# EAGLE board RJ45_DIL (EAGLE 8.3.2)
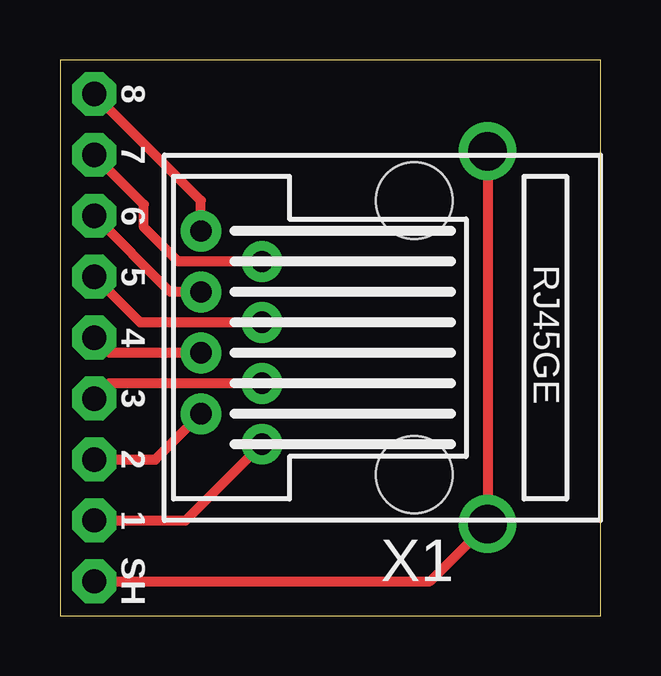
[diagram p0: board, top side]

Size 22.53 x 23.17 mm. Coordinates in mm from the lower left corner, seen from the top.
Outline: 0,0 22.53,0 22.53,23.17 0,23.17 0,0
Copper layers (1*16): Top 0.0356mm / dielectric 1.5011mm / Bottom 0.0356mm
Design rules "PCBs_io *": minimum track width 6mil, minimum drill 13mil, track to track 6mil, track to pad 6mil, pad to pad 6mil, via to via 6mil, smd to smd 6mil, copper to edge 15mil, drill to drill 6mil, minimum pad ring 16mil, minimum via ring 7mil, stop-mask expansion 3mil, vias tented up to drill 0.6mm, thermal gap 10mil

## Footprints (pad centres in the part's own frame; a part is rotated, then mirrored left to right if it is on the bottom)
1X01_BARE = drill 1.016 octagon: 1 0,0
RJ45GE = drill 0.889: 1 -4.445,5.08; 2 -3.175,7.62; 3 -1.905,5.08; 4 -0.635,7.62; 5 0.635,5.08; 6 1.905,7.62; 7 3.175,5.08; 8 4.445,7.62 | drill 1.6: SHIELD1 -7.77,-4.32; SHIELD2 7.77,-4.32 | hole 3.2: -5.715,-1.27; 5.715,-1.27

## Placement (x,y rotation side)
JP1  [1X01_BARE]  1.43,3.97 0 top
JP2  [1X01_BARE]  1.43,6.51 0 top
JP3  [1X01_BARE]  1.43,9.05 0 top
JP4  [1X01_BARE]  1.43,11.59 0 top
JP5  [1X01_BARE]  1.43,14.13 0 top
JP6  [1X01_BARE]  1.43,16.67 0 top
JP7  [1X01_BARE]  1.43,19.21 0 top
JP8  [1X01_BARE]  1.43,21.75 0 top
JP9  [1X01_BARE]  1.43,1.43 0 top
X1  RJ-45-SHIELDED  [RJ45GE]  13.49,11.59 90 top

## Library data of the parts
JP1-JP9 = my-pinhead
X1 = my-connectors

## Nets
1: JP1.1 X1.1
2: JP2.1 X1.2
3: JP3.1 X1.3
4: JP4.1 X1.4
5: JP5.1 X1.5
6: JP6.1 X1.6
7: JP7.1 X1.7
8: JP8.1 X1.8
N$9: JP9.1 X1.SHIELD1 X1.SHIELD2

## Tracks (layer width: path | path; a pad name or v marks a point on that pad's centre or on a via)
1
  Top 0.406: JP1.1 5.24,3.97 X1.1
2
  Top 0.406: JP2.1 3.97,6.51 X1.2
3
  Top 0.406: X1.3 2.06,9.68 JP3.1
4
  Top 0.406: X1.4 2.06,10.95 JP4.1
5
  Top 0.406: X1.5 3.33,12.22 JP5.1
6
  Top 0.406: X1.6 4.6,13.49 JP6.1
7
  Top 0.406: X1.7 4.92,14.76 3.49,16.19 3.49,17.14 JP7.1
8
  Top 0.406: X1.8 5.87,17.3 JP8.1
N$9
  Top 0.406: JP9.1 15.42,1.43 X1.SHIELD1 X1.SHIELD2

## Text on the board
tPlace: 8 | 7 | 6 | 5 | 4 | 3 | 2 | 1 | SH